# Altium PCB pcb.PcbDoc
Units mil, origin at the board's own origin, x right, y up, seen from the top; angles counter-clockwise.
Board outline 6000 x 2000 mil, 2 copper layers (Top Layer, Bottom Layer); 43 components, 30 nets, 123 pads, 13 vias.
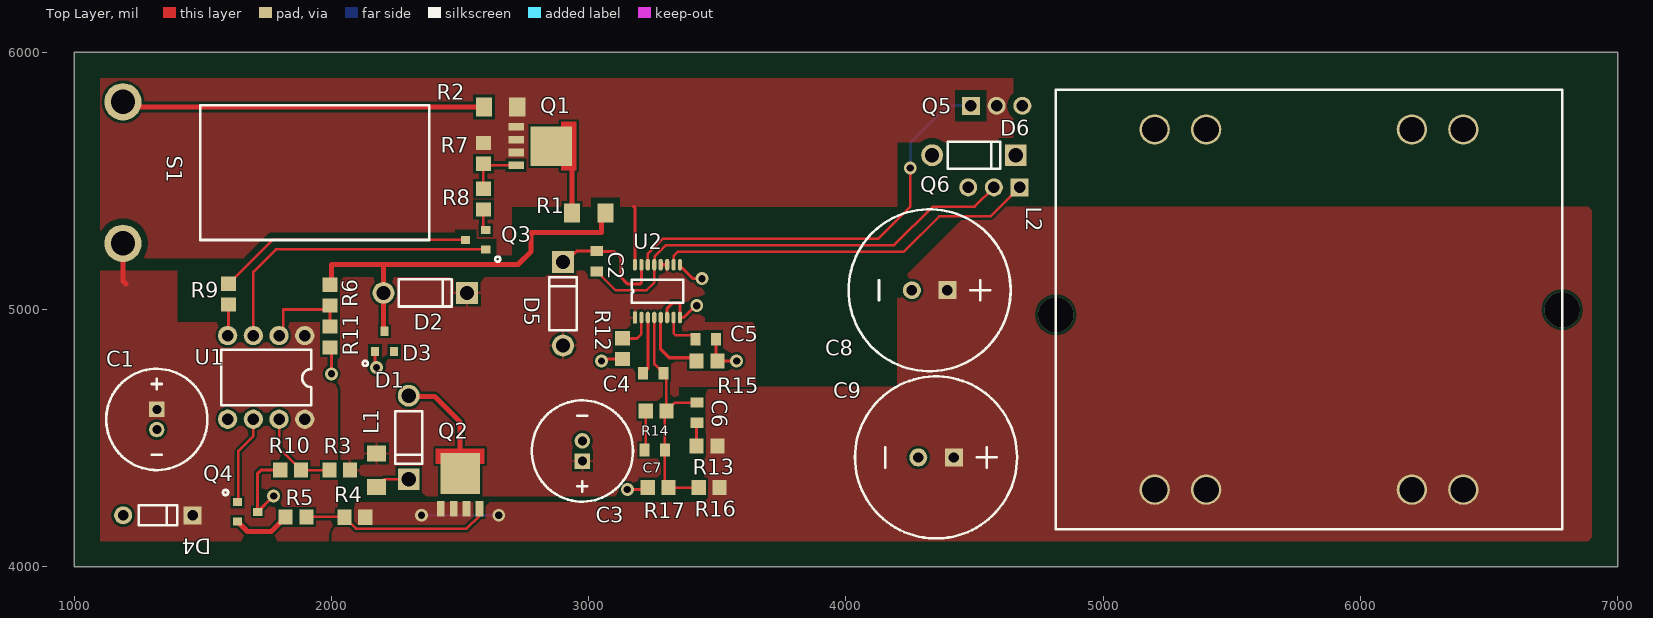
[diagram p0: Top Layer view]
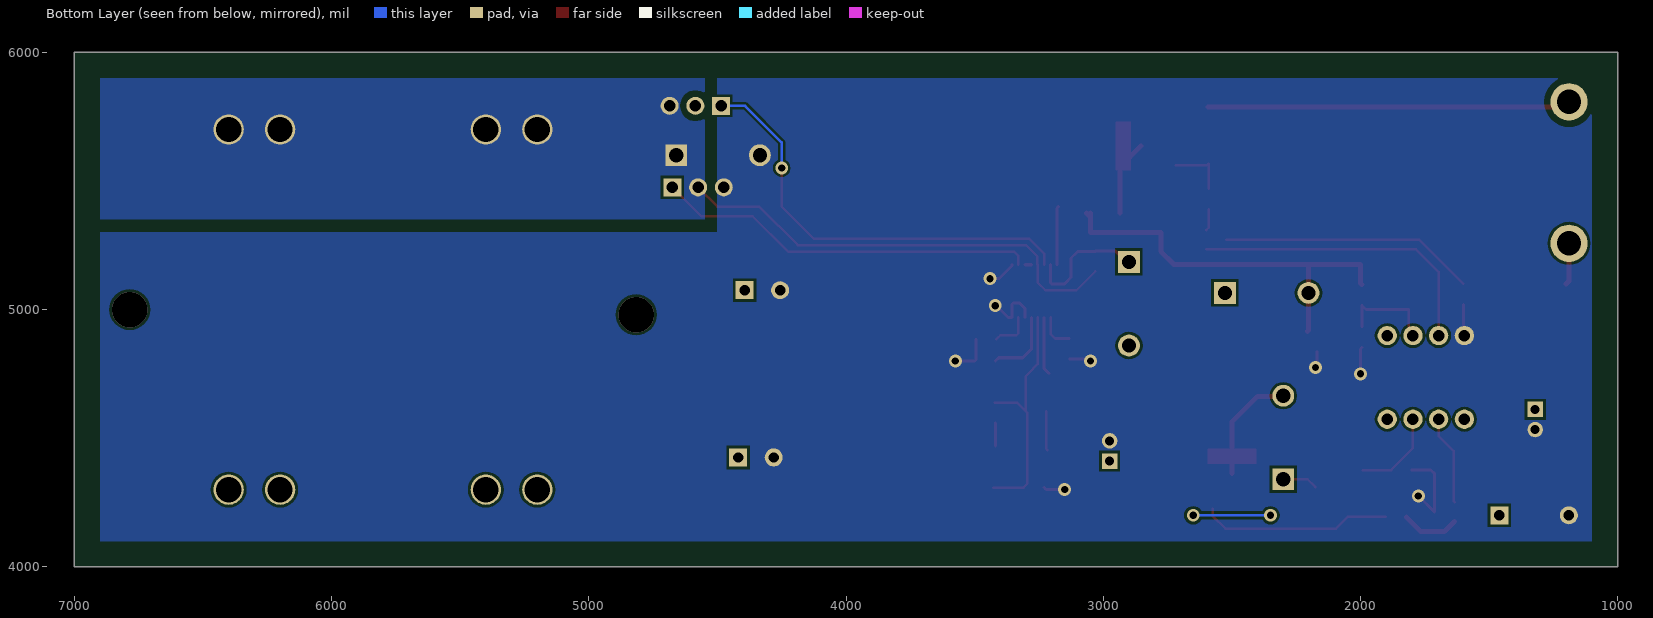
[diagram p1: Bottom Layer view, seen from below]

## Layer stack, top to bottom
Top Solder: solder mask 0.4, Solder Resist, Dk 3.5
Top Layer: signal copper 1.4
Dielectric 1: dielectric 12.6, FR-4, Dk 4.8
Bottom Layer: signal copper 1.4
Bottom Solder: solder mask 0.4, Solder Resist, Dk 3.5

## Board outline
1000,4000 7000,4000 7000,6000 1000,6000

## Design rules (kind name [scope] priority, off if disabled: settings)
Clearance "Clearance U2 Pads" [InComponent('U2') vs InComponent('U2')] p1: gap=8
Clearance "Clearance High Voltage Exeptions" [InNetClass('HV_NET') vs (InNetClass('HV_NET') OR InNet('NetC2_1'))] p2: gap=10
Clearance "Clearance High Voltage" [InNetClass('HV_NET')] p3: gap=25
Clearance [All] p4: gap=10
Height [All] p1: minheight=0 maxheight=3000 prefheight=500
HoleSize [All] p1: absolutevalues=TRUE maxlimit=187.5 minlimit=13 maxpercent=80.000 minpercent=20.000
PolygonConnect PolygonConnect_8 [All vs IsNamedPolygon('SWITCH-1')] p1: connectstyle=Direct reliefconductorwidth=10 reliefentries=4 polygonreliefangle="90 Angle" airgapwidth=10
PolygonConnect PolygonConnect_7 [All vs IsNamedPolygon('4V7-1')] p2: connectstyle=Direct reliefconductorwidth=10 reliefentries=4 polygonreliefangle="90 Angle" airgapwidth=10
PolygonConnect PolygonConnect_6 [All vs IsNamedPolygon('14V5-1')] p3: connectstyle=Direct reliefconductorwidth=10 reliefentries=4 polygonreliefangle="90 Angle" airgapwidth=10
PolygonConnect PolygonConnect_5 [All vs IsNamedPolygon('V_BAT-0')] p4: connectstyle=Direct reliefconductorwidth=10 reliefentries=4 polygonreliefangle="90 Angle" airgapwidth=10
PolygonConnect PolygonConnect_4 [All vs IsNamedPolygon('GND-0')] p5: connectstyle=Direct reliefconductorwidth=10 reliefentries=4 polygonreliefangle="90 Angle" airgapwidth=10
PolygonConnect PolygonConnect_3 [All vs IsNamedPolygon('V_BAT')] p6: connectstyle=Direct reliefconductorwidth=10 reliefentries=4 polygonreliefangle="90 Angle" airgapwidth=10
PolygonConnect PolygonConnect_2 [All vs IsNamedPolygon('V_BAT_2')] p7: connectstyle=Direct reliefconductorwidth=10 reliefentries=4 polygonreliefangle="90 Angle" airgapwidth=10
PolygonConnect PolygonConnect_1 [All vs IsNamedPolygon('GND')] p8: connectstyle=Direct reliefconductorwidth=10 reliefentries=4 polygonreliefangle="90 Angle" airgapwidth=10
PolygonConnect [All] p9: connectstyle=Relief reliefconductorwidth=10 reliefentries=4 polygonreliefangle="90 Angle" airgapwidth=10
RoomDefinition LTC3703 [InComponentClass('LTC3703')] p1: confinementstyle=ConfineIn formatcopy=TRUE lockcomponents=FALSE outline 3850,4100 3850,5500 2750,5500 2750,4100
RoomDefinition HI_VOLTAGE [InComponentClass('HI_VOLTAGE')] p2: confinementstyle=ConfineIn formatcopy=TRUE lockcomponents=FALSE outline 1103,5170 3200,5170 3200,5900 1103,5900
RoomDefinition ATtiny [InComponentClass('ATtiny')] p3: confinementstyle=ConfineIn formatcopy=TRUE lockcomponents=FALSE outline 1100,4098.65 2696,4098.65 2696,5198.65 1100,5198.65
RoomDefinition CVTR [InComponentClass('CVTR')] p4: confinementstyle=ConfineIn formatcopy=TRUE lockcomponents=FALSE outline 3450,4100 6900,4100 6900,5900 3450,5900
RoutingVias [All] p1: holewidth=28 width=50 viastyle="Through Hole" minholewidth=28 minwidth=50 maxholewidth=28 maxwidth=50
SolderMaskExpansion [All] p1: expansion=4
UnpouredPolygon [All] p1: allowunpoured=FALSE
Width [All] p1: maxlimit=20 minlimit=10 preferedwidth=10
27 further rules are at their usual default settings.

## Classes and differential pairs
net class HV_NET: HV_1 HV_2 HV_3 HV_4 V_BAT
component class ATtiny: C1 D1 D2 D3 D4 L1 Q2 Q4 R3 R4 R5 R6 R9 R10 R11 U1
component class CVTR: C8 C9 D6 L2 Q5 Q6
component class LTC3703: C2 C3 C4 C5 C6 C7 D5 R12 R13 R14 R15 R16 R17 U2
component class HI_VOLTAGE: Q1 Q3 R1 R2 R7 R8 S1

## Components (designator, comment, footprint, x,y, rotation, side; value= is the part's Value field where it differs from the comment)
C1 "Capacitor-EB Series, Type A" "EB Series Type A - 5mm" 1320.65,4572.65 r270 top
C2 "Capacitor" CAP0805 3031.04,5187.69 r270 top
C3 "Capacitor-EB Series, Type A" "EB Series Type A - 5mm" 2975,4450 r90 top
C4 "Capacitor" CAP0805 3250.65,4752 r180 top
C5 "Capacitor" CAP0805 3454.65,4885 r180 top
C6 "Capacitor" CAP0805 3420.65,4599 r90 top
C7 "Capacitor" CAP0805 3256.65,4454 r180 top
C8 "Capacitor-EB Series, Type A" "EB Series Type A - 8mm" 4325,5075 r180 top
C9 "Capacitor-EB Series, Type A" "EB Series Type A - 8mm" 4350,4425 r180 top
D1 "1N5817" DO-41 2300,4400 r90 top
D2 "1N5817" DO-41 2467,5064.65 r180 top
D3 "BZX84C12L" "3-Lead SOT-23" 2206,4915.65 r180 top
D4 "1N750" DO-35 1400,4200 r180 top
D5 "1N5817" DO-41 2900,5125 r270 top
D6 "1N5817" DO-41 4600,5600 r180 top
L1 "Inductor" RES1206 2175,4375 r90 top
L2 "RB8522-16-3M0" RB8522-16-3M0 6400,5000 r180 top
Q1 "SI7489DP" "PowerPAK SO-8" 2717.26,5710.4 r0 top
Q2 "SI7489DP" "PowerPAK SO-8" 2425,4225 r90 top
Q3 "BSS123" "3-Lead SOT-23" 2521,5271 r270 top
Q4 "BSS123" "3-Lead SOT-23" 1713,4213.65 r90 top
Q5 "IRFB4110Z" TO-220 4585.5,5792.1 r0 top
Q6 "IRFB4110Z" TO-220 4575,5475 r180 top
R1 "Resistor" RES1206 3000,5375 r0 top
R2 "Resistor" RES1206 2657.19,5787 r0 top
R3 "Resistor" RES0805 2032,4375.65 r180 top
R4 "Resistor" RES0805 2091,4192.65 r180 top
R5 "Resistor" RES0805 1862,4193.65 r180 top
R6 "Resistor" RES0805 1994,5056.29 r270 top
R7 "Resistor" RES0805 2590.26,5607.4 r270 top
R8 "Resistor" RES0805 2590.26,5429.4 r270 top
R9 "Resistor" RES0805 1600,5059.65 r270 top
R10 "Resistor" RES0805 1841,4375.65 r180 top
R11 "Resistor" RES0805 1994,4893.29 r270 top
R12 "Resistor" RES0805 3131.65,4848 r270 top
R13 "Resistor" RES0805 3459.65,4469 r0 top
R14 "Resistor" RES0805 3261.65,4605 r180 top
R15 "Resistor" RES0805 3459.65,4800 r180 top
R16 "Resistor" RES0805 3467.65,4308 r0 top
R17 "Resistor" RES0805 3269.65,4308 r180 top
S1 "110-73" 100-73 1489.26,5532.4 r0 top
U1 "ATtiny25" PDIP-8 1896,4898.65 r180 top
U2 "LTC3703" SSOP-16 3179.65,4969 r90 top

## Footprints (in the part's own frame and the unit in brackets; to place one, negate y for a bottom-side part, rotate by r counter-clockwise, add the part's x,y. Pads: shape width x height; smd on the part's side, far side on the other; paste and mask are expansions set on the pad)
"3-Lead SOT-23" [mm]
  rect 0.8x0.9 smd: 1(0.95,2) 2(-0.95,2) 3(0,0)
  silkscreen extent 1.65,2.92 2.16,3.43
100-73 [mil] "SPST Switch"
  round 145 hole 95: 1(-300,275) 2(-300,-275)
  silkscreen extent 0,-262 890,262
CAP0805 [mm]
  rect 1x1.25 smd: 1(-1,0) 2(1,0)
DO-35 [mil]
  rect 70x70 hole 40: 1(-60,0)
  round 70 hole 40: 2(210,0)
  silkscreen extent 0,-39 150,39
DO-41 [mil]
  rect 85x85 hole 55: 1(-60,0)
  round 85 hole 55: 2(265,0)
  silkscreen extent 0,-53 205,53
"EB Series Type A - 5mm" [mil] "Radial Capacitor EB Series Type A, 5mm Body Diameter"
  rect 60x60 hole 35: 1(-39.37,0)
  round 60 hole 35: 2(39.37,0)
  silkscreen extent -197,-197 197,197
"EB Series Type A - 8mm" [mil] "Radial Capacitor EB Series Type A, 8mm Body Diameter"
  rect 70x70 hole 40: 1(-68.9,0)
  round 70 hole 40: 2(68.9,0)
  silkscreen extent -315,-315 315,315
PDIP-8 [mil]
  round 75 hole 45: 1(0,0) 2(100,0) 3(200,0) 4(300,0) 5(300,325) 6(200,325) 7(100,325) 8(0,325)
  silkscreen extent -25,55 325,270
"PowerPAK SO-8" [mil]
  rect 60x30 smd: 1(0,0) 2(0,-50) 3(0,-100) 4(0,-150)
  rect 160x154 smd: 5(137,-75)
  Top Layer region: 175,-170 235,-170 235,20 175,20
RB8522-16-3M0 [mm] "Size 4"
  round 3 hole 2.5: 1(0,-17.78) 2(5.08,-17.78) 3(25.4,-17.78) 4(30.48,-17.78) 5(30.48,17.78) 6(25.4,17.78) 7(5.08,17.78) 8(0,17.78)
  silkscreen extent -9.76,-21.7 40.24,21.7
RES0805 [mm]
  rect 1.4x1.5 smd: 1(-1.025,0) 2(1.025,0)
RES1206 [mm]
  rect 1.6x1.9 smd: 1(-1.65,0) 2(1.65,0)
SSOP-16 [mil]
  rect 45x16.5 smd: 1(0,0)
  oval 45x16.5 smd: 2(0,-25) 3(0,-50) 4(0,-75) 5(0,-100) 6(0,-125) 7(0,-150) 8(0,-175) 9(205,-175) 10(205,-150) 11(205,-125) 12(205,-100) 13(205,-75) 14(205,-50) 15(205,-25) 16(205,0)
  silkscreen extent 58,-188 148,13
TO-220 [mil]
  rect 70x70 hole 45: 1(-100,0)
  round 70 hole 45: 2(0,0) 3(100,0)

## Part data
C1 C3 C8 C9: "Electrolytic Capacitor"

## Via types
v1: diameter 50, hole 28, Top Layer to Bottom Layer, 11 vias
v2: diameter 137.8, hole 137.8, Top Layer to Bottom Layer, 2 vias

## Nets (pads, with @x,y where several pads share a name; then routed paths per layer and width w, separated by ;. In a path a pad name is that pad's centre, name@x,y a point inside that pad or via, vN(x,y) a via of type N, cw(c..) or ccw(c..) an arc to the next point about the centre after c; other vN are vias at no path point)
4V7: C1.1 D4.1 S1.2 U1.1 U1.8 | length 161.9
  Top Layer w20: S1.2 1189.26,5110.74 1200,5100
12V0_CTRL: Q3.1 U1.3 | length 1187.4
  Top Layer w10: U1.3 1696,5146 1783.6,5233.6 Q3.1
12V0_MEAS: R6.2 R11.1 U1.2 | length 378.6
  Top Layer w10: U1.2 1812.5,4915.15 1812.5,5000 1978.06,5000 R6.2 R11.1
14V5: C8.1 C9.1 L2.5 L2.6 L2.7 L2.8 Q2.1 Q2.2 Q2.3 R4.1 R13.2 R16.2 | length 300
  Bottom Layer w10: v1(2350,4200) v1(2650,4200)
14V5_EN: Q4.1 U1.6 | length 348.2
  Top Layer w10: Q4.1 1637.5,4254.29 1637.5,4450 1696,4508.5 U1.6
14V5_MEAS: R3.2 R10.1 U1.7 | length 343.6
  Top Layer w10: U1.7 1796,4461 R10.1 R3.2
GND: C1.2 C3.2 C5.1 C8.2 C9.2 D3.1 D4.2 D6.2 Q4.3 Q6.3 R9.2 R10.2 R11.2 R12.2 R15.1 R17.2 U1.4 U2.6 U2.8 U2.9 | length 1293.5
  Top Layer w12: U1.4 1600,4902.65 R9.2 ; v1(1775,4275) 1774.35,4275 Q4.3 1713,4363 1725.65,4375.65 R10.2 ; R11.2 2000,4846.94 v1(2000,4750) ; D3.1 2168.6,4781.4 v1(2175,4775) ; v1(3050,4800) 3057.65,4807.65 R12.2 ; v1(3150,4300) 3221.29,4300 R17.2 ; U2.6 3304.65,5004.65 3325,5025 3350,5025 3354.65,5020.35 U2.8 3369,4969 3415,5015 v1(3420,5015) ; U2.9 3354.65,5170.35 3405,5120 v1(3440,5120) ; C5.1 3494.02,4805.98 R15.1 v1(3575,4800)
HV_1: R2.1 S1.1 | length 1411.4
  Top Layer w20: S1.1 1209.66,5787 R2.1
HV_2: Q1.4 R7.2 R8.1 | length 227
  Top Layer w10: R8.1 R7.2 2596.91,5560.4 Q1.4
HV_3: Q3.2 R8.2 | length 84.6
  Top Layer w10: R8.2 2590.26,5317.88 Q3.2
HV_4: Q1.5 R1.1 | length 293.9
  Top Layer w20: Q1.5 2935.04,5554.62 R1.1
NetC2_1: C2.1 D5.1 U2.15 | length 494
  Top Layer w12: D5.1@2900,5175 2952.06,5227.06 C2.1 3033.09,5225 3100,5225 3125,5200 3125,5125 3150,5100 3200,5100 3204.65,5104.65 U2.15
NetC4_1: C4.1 C6.2 C7.1 R14.1 R16.1 R17.1 U2.4 | length 938.6
  Top Layer w10: U2.4 3254.65,4787.37 C4.1 3302,4740.02 R14.1 ; C6.2 3335.37,4638.37 R14.1 ; R16.1 R17.1 3296.02,4321.98 C7.1 3296.02,4599.02 R14.1
NetC4_2: C4.2 U2.3 | length 224.6
  Top Layer w12: C4.2 3229.65,4770.37 U2.3
NetC5_2: C5.2 U2.7 | length 156.2
  Top Layer w10: U2.7 3329.65,4907.85 3337.5,4900 3400.28,4900 C5.2
NetC6_1: C6.1 R13.1 | length 91.2
  Top Layer w12: R13.1 3419.29,4558.28 C6.1
NetC7_2: C7.2 R14.2 | length 152.7
  Top Layer w10: C7.2 3221.29,4458.02 R14.2
NetD1_1: D1.1 L1.1 | length 137.4
  Top Layer w10: L1.1 2204.96,4340 D1.1
NetD1_2: D1.2 Q2.5 | length 443
  Top Layer w20: D1.2 2302.5,4662.5 2400,4662.5 2500,4562.5 Q2.5
NetD2_2: D2.2 D3.3 R1.2 R6.1 | length 1577.1
  Top Layer w20: R6.1 2000,5102.65 2000,5175 2200,5175 ; D3.3 2202,4919.65 D2.2 2202,5173 2200,5175 ; R1.2@3050,5367.52 R1.2@3050,5375 ; R1.2 3050,5360.04 3050,5300 2775,5300 2775,5225 2725,5175 2200,5175
NetQ2_4: Q2.4 R4.2 R5.1 | length 739.1
  Top Layer w10: R5.1 2049.65,4193.65 R4.2 2095.17,4148.12 2525,4148.12 2575,4198.12 Q2.4
NetQ3_3: Q3.3 R9.1 | length 991.8
  Top Layer w10: R9.1 1771,5271 Q3.3
NetQ4_2: Q4.2 R5.2 | length 226.7
  Top Layer w20: Q4.2 1673,4137.5 1765.5,4137.5 R5.2
NetQ5_1: Q5.1 U2.14 | length 1683.6
  Top Layer w10: U2.14 3229.65,5217.15 3287.5,5275 4125,5275 4250,5400 v1(4250,5550)
  Bottom Layer w10: v1(4250,5550) 4250,5650 4392.1,5792.1 Q5.1
NetQ6_1: Q6.1 U2.10 | length 1489.9
  Top Layer w10: U2.10 3329.65,5207.85 3346.79,5225 4225,5225 4362.5,5362.5 4562.5,5362.5 Q6.1
NetR12_1: R12.1 U2.2 | length 144.8
  Top Layer w10: R12.1 3132.5,4887.5 3187.5,4887.5 3204.65,4904.65 U2.2
NetR15_2: R15.2 U2.5 | length 282.1
  Top Layer w12: U2.5 3279.65,4845.35 3312.5,4812.5 3406.79,4812.5 R15.2
SWITCH: C2.2 D6.1 L2.1 L2.2 L2.3 L2.4 Q5.3 Q6.2 U2.13 | length 1798.6
  Top Layer w10: C2.2 3104.35,5075 3225,5075 3254.65,5104.65 U2.13 3256.4,5175.75 3256.4,5206.4 3300,5250 4187.5,5250 4337.5,5400 4500,5400 Q6.2
V_BAT: Q1.1 Q1.2 Q1.3 Q5.2 R2.2 R7.1 U2.16 | length 227.9
  Top Layer w12: 3175,5400 3179.65,5395.35 U2.16
VCC_LTC: C3.1 D2.1 D5.2 L1.2 R3.1 U2.1 U2.11 U2.12 | length 25
  Top Layer w12: U2.12 U2.11
pads on no net: D3.2 U1.5
copper on no net:
  other v2: 4815.75,4980 6784.25,5000

## Polygon pours and split planes (outlines as drawn)
SWITCH on Bottom Layer "SWITCH-1" (solid, pour order 2): 6900,5900 6900,5350 4550,5350 4550,5900
GND on Bottom Layer "GND-0" (solid, pour order 4): 1100,5900 4500,5900 4500,5300 6900,5300 6900,4100 1100,4100
VCC_LTC on Top Layer "VCC_LTC" (solid, pour order 8): 2025,4275 2025,5125 2825,5125 2825,5150 3450,5150 3450,4950 3650,4950 3650,4700 3350,4700 3350,4275
4V7 on Top Layer "4V7-1" (solid, pour order 20): 1100,4950 1100,5150 1400,5150 1400,4950 2025,4950 2025,4100 1100,4100
14V5 on Top Layer "14V5-1" (solid, pour order 16): 2000,4250 2000,4100 6800,4100 6900,4100 6900,5400 4500,5400 4200,5100 4200,4700 3450,4700 3450,4250
V_BAT on Top Layer "V_BAT-0" (solid, pour order 6): 1100,5900 4650,5900 4650,5650 4200,5650 4200,5400 2700,5400 2700,5200 1100,5200